# Altium PCB ALTAIR_PD_Sergeant_V26.4c.PcbDoc (part 3 of 4)
Units mm, origin at the board's own origin, x right, y up, seen from the top; angles counter-clockwise.
Board outline 74 x 56 mm, 4 copper layers (Top Layer, Layer 1, Layer 2, Bottom Layer), stack 1.675 mm thick; 239 components, 159 nets, 760 pads, 127 vias.
Unrouted connection lines stored in the file: 489.
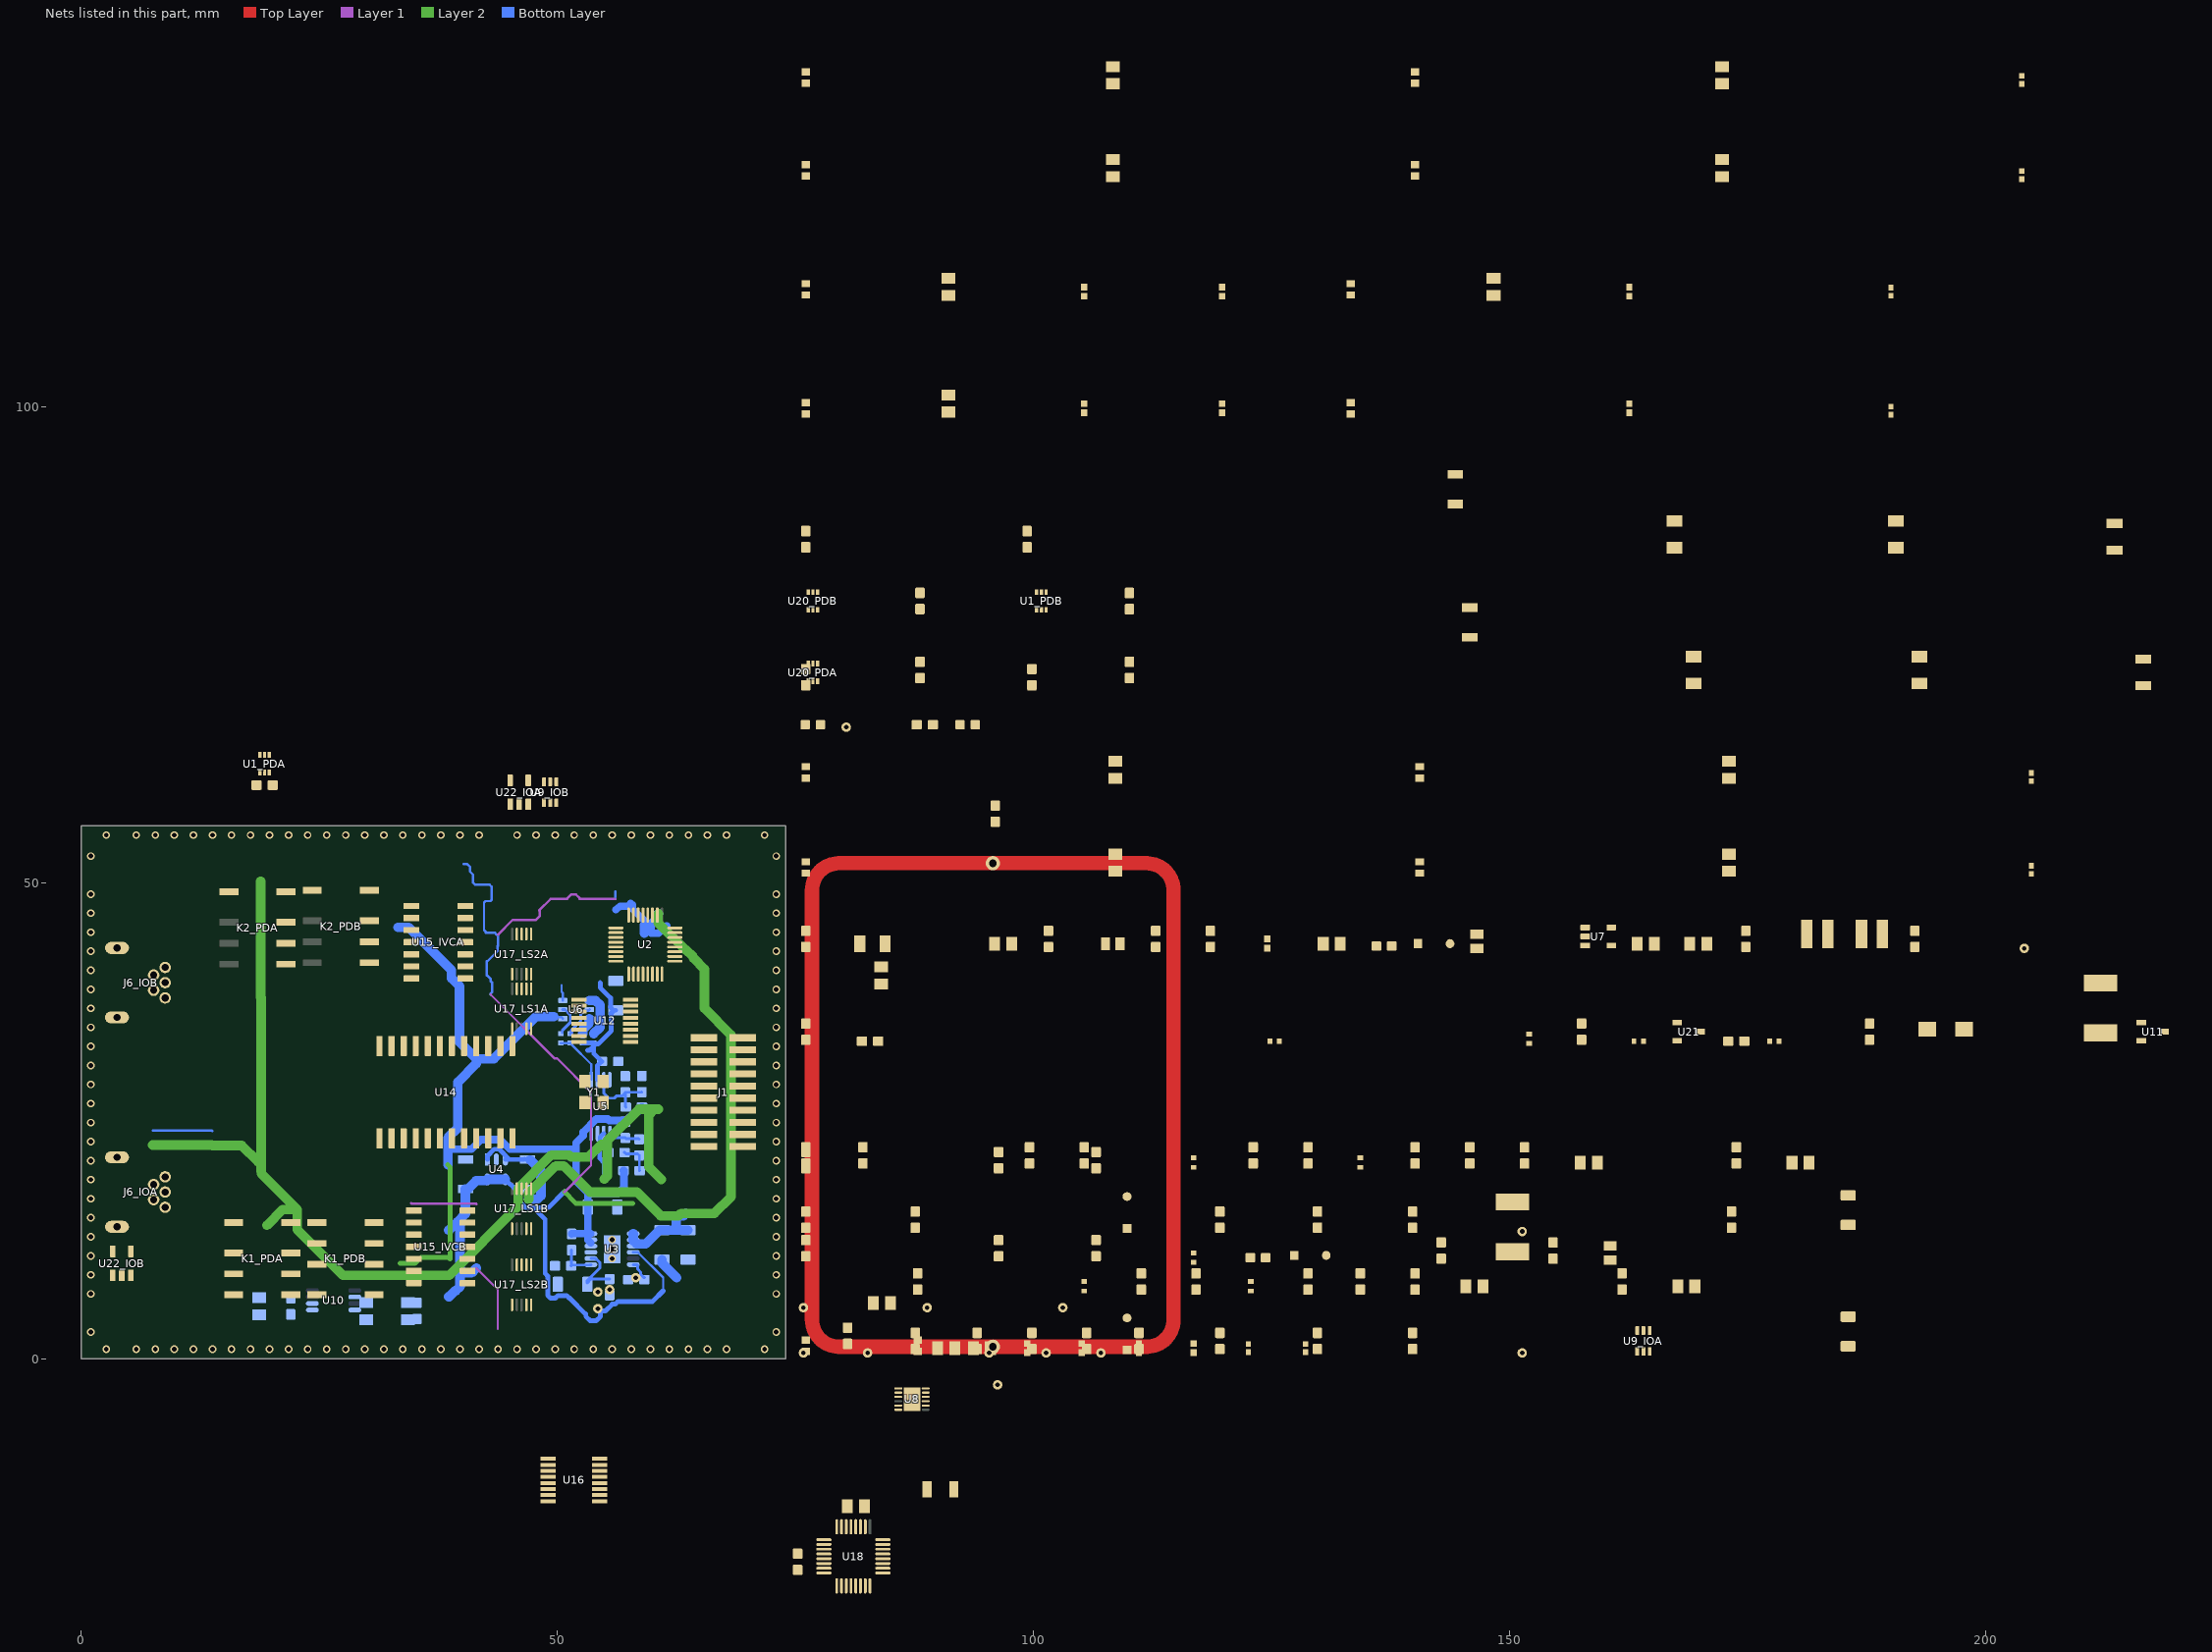
[diagram p4: the nets of this part, all layers, seen from the top]

## Via types
v1: diameter 0.8, hole 0.5, Top Layer to Bottom Layer, 122 vias
v2: diameter 0.6, hole 0.3, Top Layer to Bottom Layer, tented both sides, 5 vias

## Nets (pads, with @x,y where several pads share a name; then routed paths per layer and width w, separated by ;. In a path a pad name is that pad's centre, name@x,y a point inside that pad or via, vN(x,y) a via of type N, cw(c..) or ccw(c..) an arc to the next point about the centre after c; other vN are vias at no path point) (continued)
copper on no net: (continued)
  Bottom Layer w0.75: 31.75,21 35.5,24.75 37.8,24.75 37.873,24.677 38.531,24.677 ; 33.3,49.6 32.658,48.958 31.436,48.958 ; 37.278,52.417 37.274,52.421 35.304,52.421 35.3,52.425 35.15,52.425 34.762,52.813 33.787,52.813 33.787,52.537 31,49.75 31,48.958 31.436,48.958 ; 38.125,25.35 35.5,27.975 35.5,39.75 31,44.25 31,47.168 31.436,47.168 31.961,47.693 31.961,48.434 31.436,48.958 ; 38.25,24.75 38.25,25.35 ; 38.719,51.742 38.719,52.096 39.219,52.596 40.791,52.596 41.775,51.612 41.775,50.9 41.975,50.7 42.125,50.7 42.325,50.5 44.345,50.5 45.392,49.453 45.547,49.453 45.999,49.001 45.999,48.425 46.4,48.826 46.4,51.086 46.839,51.525 46.875,51.525 47.075,51.725 47.075,51.875 47.163,51.962 48.687,51.962 48.775,52.05 ; 48.75,47.836 50.364,47.836 51.454,46.746 51.454,46.741 52.225,45.97 52.225,45.275 52.35,45.15 52.4,45.15 ; 53.35,47.175 53.4,47.175 54.1,46.475 54.1,45.15 ; 54.15,45.15 54.6,44.7 57.024,44.7
  Bottom Layer w1: 60.75,42.35 60.75,42.4 61.5,43.15 61.5,43.6 ; 63.9,44.55 63.9,43.695 65.29,42.305 66.15,42.305 66.153,42.303 69.897,42.303 69.9,42.3 ; 63.965,35.75 63.769,35.75 63.25,36.269 63.25,36.5 ; 64.651,33.847 63.25,35.247 63.25,36.5 ; 66.15,37.075 66.015,36.94 63.69,36.94 63.25,36.5
  other v1: 69.775,1 1,4.8 73,4.8 1,50.8 73,50.8 69.775,55

## Polygon pours and split planes (outlines as drawn)
SYS_GND on Top Layer "NONET_L01_P265" (solid, remove dead copper, shelved, pour order 265): 0,56 74,56 74,0 0,0
4V9 on Top Layer "NONET_L01_P264" (solid, remove dead copper, shelved, pour order 264): 51.5,53.5 51.5,44.5 50.5,43.5 43,43.5 43,34.5 44.5,33 56,33 56,19 54.5,17.5 43,17.5 43,21 14,21 14,10 11,10 11,12 7,16 2.5,16 2.5,47 3.5,48 8,48 8,53.5
no net on Top Layer "TraceGuard" (solid, shelved, pour order 262): 1011 vertices, not listed, extent 6.107,25.105 38.045,51.556
no net on Top Layer "Intercon_guard" (solid, shelved, pour order 239): 25.574,39.056 25.631,39.052 25.728,39.032 25.782,39.014 25.838,39.003 25.889,38.978 25.942,38.96 25.99,38.928 26.04,38.903 26.123,38.848 26.166,38.81 26.213,38.779 26.25,38.736 26.293,38.699 26.325,38.651 26.362,38.609 26.417,38.526 26.443,38.475 26.474,38.428 26.492,38.374 26.517,38.323 26.529,38.267 26.547,38.214 26.566,38.116 26.572,38.031 26.583,37.947 26.583,32.039 26.572,31.954 26.566,31.869 26.547,31.772 26.529,31.718 26.517,31.662 26.492,31.611 26.474,31.558 26.443,31.51 26.417,31.46 26.362,31.377 26.325,31.334 26.293,31.287 26.25,31.25 26.213,31.207 26.166,31.175 26.123,31.138 26.04,31.083 25.99,31.057 25.942,31.026 25.889,31.008 25.838,30.983 25.782,30.971 25.728,30.953 25.631,30.934 25.574,30.93 25.518,30.919 25.461,30.923 25.405,30.919 25.349,30.93 25.292,30.934 25.195,30.953 25.141,30.971 25.085,30.983 25.034,31.008 24.981,31.026 24.933,31.057 24.883,31.083 24.8,31.138 24.757,31.175 24.71,31.207 24.672,31.25 24.63,31.287 24.598,31.334 24.561,31.377 24.506,31.46 24.48,31.51 24.449,31.558 24.431,31.611 24.405,31.662 24.394,31.718 24.376,31.772 24.357,31.869 24.351,31.954 24.34,32.039 24.34,37.947 24.351,38.031 24.357,38.116 24.376,38.214 24.394,38.267 24.405,38.323 24.431,38.374 24.449,38.428 24.48,38.475 24.506,38.526 24.561,38.609 24.598,38.651 24.63,38.699 24.672,38.736 24.71,38.779 24.757,38.81 24.8,38.848 24.883,38.903 24.933,38.928 24.981,38.96 25.034,38.978 25.085,39.003 25.141,39.014 25.195,39.032 25.292,39.052 25.349,39.056 25.405,39.067 25.461,39.063 25.518,39.067
no net on Top Layer "NONET_L01_P238" (solid, shelved, pour order 238): 32.1,30.318 32.1,23.5 29.5,23.5 28.75,24.25 27,24.25 27,30.318
no net on Top Layer "NONET_L01_P231" (solid, shelved, pour order 231): 39,41.7 38.3,42.4 33.6,42.4 31.9,40.7 31.9,36.7 33.31,35.29 39,35.29
no net on Top Layer "SOLDIER_GUARD_L01_P001" (solid, shelved, pour order 225): 47.394,35.162 47.895,34.66 47.895,29.5 46.364,29.5 46.364,33.466 45.701,34.13 44.008,34.13 43.494,34.644 43.494,42.43 48.737,42.43 49.994,41.173 49.994,38.794 47.394,36.194
no net on Top Layer "NONET_L01_P226" (solid, shelved, pour order 226): 46.364,29.236 48.864,29.236 48.864,26.736 46.364,26.736
no net on Top Layer "SOLDIER_GUARD_L03_P001" (solid, shelved, pour order 228): 44.688,29.882 45.755,30.95 49.333,30.95 50.582,29.701 50.582,26.244 49.538,25.2 45.863,25.2 44.688,26.375
SYS_GND on Bottom Layer "SYS_GND_L04_P001" (solid, remove dead copper, shelved, pour order 252): 0,56 74,56 74,0 0,0
no net on Bottom Layer "GUARD_L04_P002" (solid, shelved, pour order 245): 8.874,36.025 10.006,36.025 11.15,36.724 11.15,39.463 10.502,39.725 8.77,39.725 8.052,39.482 8.052,36.399
VBAT on Bottom Layer "VBAT_L04_P002" (solid, shelved, pour order 248): 64,11.925 64.325,12.25 64.325,14.275 64.075,14.525 57.375,14.525 56.7,13.85 56.7,12.975 57.75,11.925
no net on Bottom Layer "SOLDIER_GUARD_L04_P001" (solid, shelved, pour order 247): 49.333,26.325 45.958,26.325 45.958,29.775 49.333,29.775
no net on Bottom Layer "GUARD_L04_P003" (solid, shelved, pour order 190): 10.433,51.825 14.751,51.825 14.751,47.857 13.481,46.587 11.576,46.587 10.433,47.73
no net on Top Solder "SOLDIER_GUARD_L01_P001" (solid, shelved, pour order 221): 47.394,35.162 47.895,34.66 47.895,29.495 46.364,29.495 46.364,33.466 45.701,34.13 44.008,34.13 43.494,34.644 43.494,42.43 48.737,42.43 49.994,41.173 49.994,38.794 47.394,36.194
no net on Top Solder "SOLDIER_GUARD_L03_P001" (solid, shelved, pour order 144): 44.688,29.882 45.755,30.95 49.333,30.95 50.582,29.701 50.582,26.244 49.538,25.2 45.863,25.2 44.688,26.375
no net on Top Solder "TIA_ADCIN_L01_P234" (solid, shelved, pour order 234): 32.1,30.4 32.1,23.5 29.5,23.5 28.75,24.25 27,24.25 27,30.4
no net on Top Solder "GUARD_L01_P149" (solid, shelved, pour order 149): 39,41.7 38.3,42.4 33.6,42.4 32,40.8 32,37.042 33.2,35.5 39,35.3
no net on Top Solder (solid, shelved): 11.6,20.4 13.5,20.4 13.5,10.4 11.5,10.4
no net on Top Solder "NONET_LTS_P001" (solid, shelved): 0,34.375 0,0.15 0.15,0 74,0 74,56 -0.05,56 -0.05,34.375 1.8,34.375 1.8,3.5 3.775,1.525 69.775,1.525 72.175,3.5 72.175,51.525 69.775,54.075 4.325,54.075 1.775,51.525 1.8,34.375
no net on Bottom Solder "GUARD_L04_P003" (solid, shelved, pour order 254): 10.433,51.825 14.751,51.825 14.751,47.857 13.481,46.587 11.576,46.587 10.433,47.73
no net on Bottom Solder "GUARD_L04_P001" (solid, shelved, pour order 246): 8.874,36.025 10.006,36.025 11.15,36.724 11.15,39.463 10.502,39.725 8.77,39.725 8.052,39.482 8.052,36.399
no net on Bottom Solder "NONET_LBS_P001" (solid, shelved): 0.025,34.372 0.025,0.125 0.15,0 74,0 74,56 -0.05,56 0.025,34.375 1.8,34.325 1.8,3.5 3.775,1.525 69.825,1.525 72.225,4.35 72.225,50.775 69.825,54.075 4.325,54.075 1.775,51.525 1.8,34.325
SYS_GND on Layer 2 "SYS_GND_L03_P001" (solid, remove dead copper, shelved, pour order 257): 0,56 74,56 74,0 0,0
4V9 on Layer 2 "NONET_L03_P191" (solid, shelved, pour order 191): 51.575,53.349 51.575,44.349 50.575,43.349 43.075,43.349 43.075,34.349 44.575,32.849 56.075,32.849 56.075,18.849 54.575,17.349 43.075,17.349 43.075,20.849 14.075,20.849 14.075,9.849 11.075,9.849 11.075,11.849 7.075,15.849 2.575,15.849 2.575,46.849 3.575,47.849 8.075,47.849 8.075,53.349
no net on Layer 2 "GUARD_L04_P001" (solid, shelved, pour order 188): 8.874,36.025 10.006,36.025 11.15,36.724 11.15,39.463 10.502,39.725 8.77,39.725 8.052,39.482 8.052,36.399
no net on Layer 2 "GUARD_L04_P003" (solid, shelved, pour order 184): 10.433,51.825 14.751,51.825 14.751,47.857 13.481,46.587 11.576,46.587 10.433,47.73
no net on Layer 2 "SOLDIER_GUARD_L03_P001" (solid, shelved, pour order 148): 44.688,29.882 45.755,30.95 49.333,30.95 50.582,29.701 50.582,26.244 49.538,25.2 45.863,25.2 44.688,26.375
SYS_GND on Layer 1 "SYS_GND_L02_P001" (solid, remove dead copper, shelved, pour order 255): 0,56 74,56 74,0 0,0
4V9 on Layer 1 "NONET_L02_P241" (solid, shelved, pour order 241): 51.5,53.5 51.5,44.5 50.5,43.5 43,43.5 43,34.5 44.5,33 56,33 56,19 54.5,17.5 43,17.5 43,21 14,21 14,10 11,10 11,12 7,16 2.5,16 2.5,47 3.5,48 8,48 8,53.5
no net on Layer 1 "TIA_GUARD_SUB" (solid, shelved, pour order 230): 290 vertices, not listed, extent 6.38,10.879 13.62,27.621
no net on Layer 1 "IVC_GUARD_SUB" (solid, shelved, pour order 229): 23.037,33.015 23.094,33.012 23.191,32.992 23.245,32.974 23.301,32.963 23.352,32.938 23.405,32.919 23.452,32.888 23.503,32.863 23.586,32.807 23.65,32.751 23.717,32.7 25.763,30.654 30.729,30.654 30.814,30.643 30.899,30.637 30.996,30.618 31.05,30.599 31.106,30.588 31.156,30.563 31.21,30.545 31.257,30.513 31.308,30.488 31.391,30.433 31.434,30.396 31.481,30.364 31.518,30.321 31.561,30.284 31.593,30.237 31.63,30.194 31.685,30.111 31.711,30.06 31.742,30.013 31.76,29.959 31.785,29.908 31.797,29.853 31.815,29.799 31.834,29.701 31.838,29.645 31.849,29.589 31.845,29.532 31.849,29.476 31.838,29.42 31.834,29.363 31.815,29.266 31.797,29.212 31.785,29.156 31.76,29.105 31.742,29.052 31.711,29.004 31.685,28.953 31.63,28.871 31.593,28.828 31.561,28.781 31.518,28.743 31.481,28.701 31.434,28.669 31.391,28.632 31.308,28.576 31.257,28.551 31.21,28.52 31.156,28.501 31.106,28.476 31.05,28.465 30.996,28.447 30.899,28.428 30.814,28.422 30.729,28.411 25.299,28.411 25.271,28.415 25.242,28.413 25.187,28.424 25.13,28.428 25.032,28.447 24.979,28.465 24.923,28.476 24.872,28.501 24.818,28.52 24.771,28.551 24.72,28.576 24.719,28.577 24.637,28.632 24.622,28.645 24.595,28.669 24.547,28.701 24.529,28.722 24.506,28.739 22.132,31.114 22.08,31.181 22.024,31.245 21.969,31.328 21.943,31.379 21.912,31.426 21.894,31.48 21.868,31.531 21.857,31.586 21.839,31.64 21.82,31.738 21.816,31.794 21.805,31.85 21.809,31.907 21.805,31.963 21.816,32.019 21.82,32.076 21.839,32.173 21.857,32.227 21.868,32.283 21.894,32.334 21.912,32.388 21.943,32.435 21.969,32.486 22.024,32.568 22.061,32.611 22.093,32.658 22.135,32.696 22.173,32.738 22.22,32.77 22.263,32.807 22.346,32.863 22.396,32.888 22.444,32.919 22.497,32.938 22.548,32.963 22.604,32.974 22.658,32.992 22.755,33.012 22.812,33.015 22.868,33.026 22.924,33.023 22.981,33.026
no net on Layer 1 "Intercon_guard_Sub" (solid, shelved, pour order 224): 25.574,39.056 25.631,39.052 25.728,39.032 25.782,39.014 25.838,39.003 25.889,38.978 25.942,38.96 25.99,38.928 26.04,38.903 26.123,38.848 26.166,38.81 26.213,38.779 26.25,38.736 26.293,38.699 26.325,38.651 26.362,38.609 26.417,38.526 26.443,38.475 26.474,38.428 26.492,38.374 26.517,38.323 26.529,38.267 26.547,38.214 26.566,38.116 26.572,38.031 26.583,37.947 26.583,32.039 26.572,31.954 26.566,31.869 26.547,31.772 26.529,31.718 26.517,31.662 26.492,31.611 26.474,31.558 26.443,31.51 26.417,31.46 26.362,31.377 26.325,31.334 26.293,31.287 26.25,31.25 26.213,31.207 26.166,31.175 26.123,31.138 26.04,31.083 25.99,31.057 25.942,31.026 25.889,31.008 25.838,30.983 25.782,30.971 25.728,30.953 25.631,30.934 25.574,30.93 25.518,30.919 25.461,30.923 25.405,30.919 25.349,30.93 25.292,30.934 25.195,30.953 25.141,30.971 25.085,30.983 25.034,31.008 24.981,31.026 24.933,31.057 24.883,31.083 24.8,31.138 24.757,31.175 24.71,31.207 24.672,31.25 24.63,31.287 24.598,31.334 24.561,31.377 24.506,31.46 24.48,31.51 24.449,31.558 24.431,31.611 24.405,31.662 24.394,31.718 24.376,31.772 24.357,31.869 24.351,31.954 24.34,32.039 24.34,37.947 24.351,38.031 24.357,38.116 24.376,38.214 24.394,38.267 24.405,38.323 24.431,38.374 24.449,38.428 24.48,38.475 24.506,38.526 24.561,38.609 24.598,38.651 24.63,38.699 24.672,38.736 24.71,38.779 24.757,38.81 24.8,38.848 24.883,38.903 24.933,38.928 24.981,38.96 25.034,38.978 25.085,39.003 25.141,39.014 25.195,39.032 25.292,39.052 25.349,39.056 25.405,39.067 25.461,39.063 25.518,39.067
no net on Layer 1 "SOLDIER_GUARD_L01_P001" (solid, shelved, pour order 165): 47.394,35.162 47.895,34.66 47.895,29.495 46.364,29.495 46.364,33.466 45.701,34.13 44.008,34.13 43.494,34.644 43.494,42.43 48.737,42.43 49.994,41.173 49.994,38.794 47.394,36.194
no net on Layer 1 "SOLDIER_GUARD_L02_P001" (solid, shelved, pour order 159): 44.588,29.782 45.655,30.85 49.233,30.85 50.477,29.606 50.477,26.139 49.438,25.1 45.762,25.1 44.588,26.275
no net on Layer 1 "NONET_L02_P187" (solid, shelved, pour order 187): 39,41.7 38.3,42.4 33.6,42.4 31.9,40.7 31.9,36.7 33.31,35.29 39,35.29
no net on Layer 1 "NONET_L02_P219" (solid, shelved, pour order 219): 32.1,30.318 32.1,23.5 29.5,23.5 28.75,24.25 27,24.25 27,30.318